# Altium PCB PCB1.PcbDoc
Units mil, origin at the board's own origin, x right, y up, seen from the top; angles counter-clockwise.
Board outline 3937.01 x 3937.01 mil, 2 copper layers (Top Layer, Bottom Layer); 42 components, 28 nets, 160 pads, 4 vias.
Unrouted connection lines stored in the file: 40.
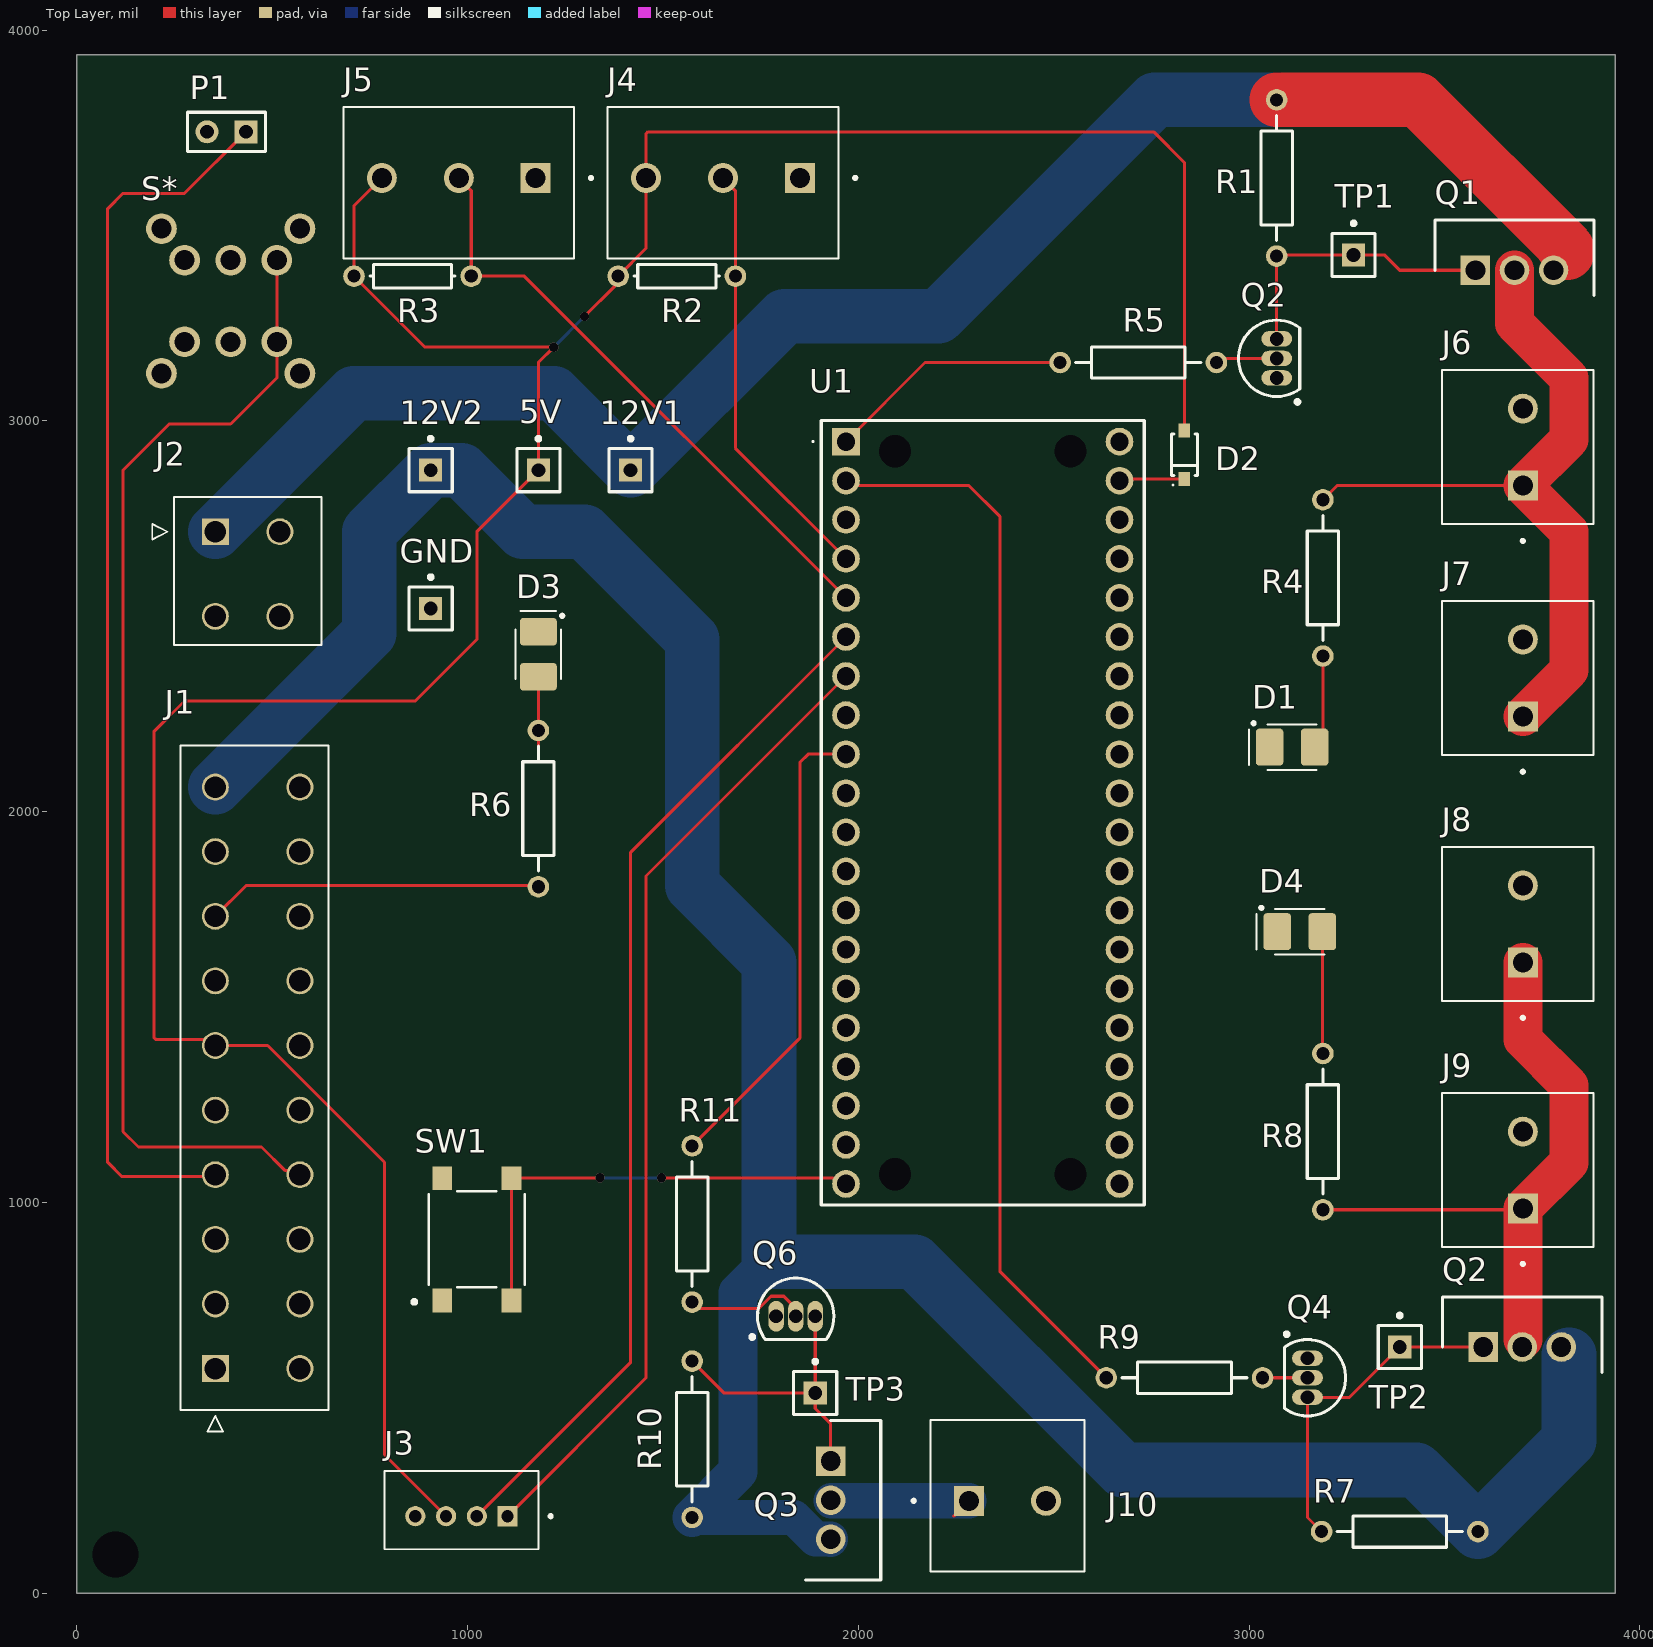
[diagram p0: Top Layer view]
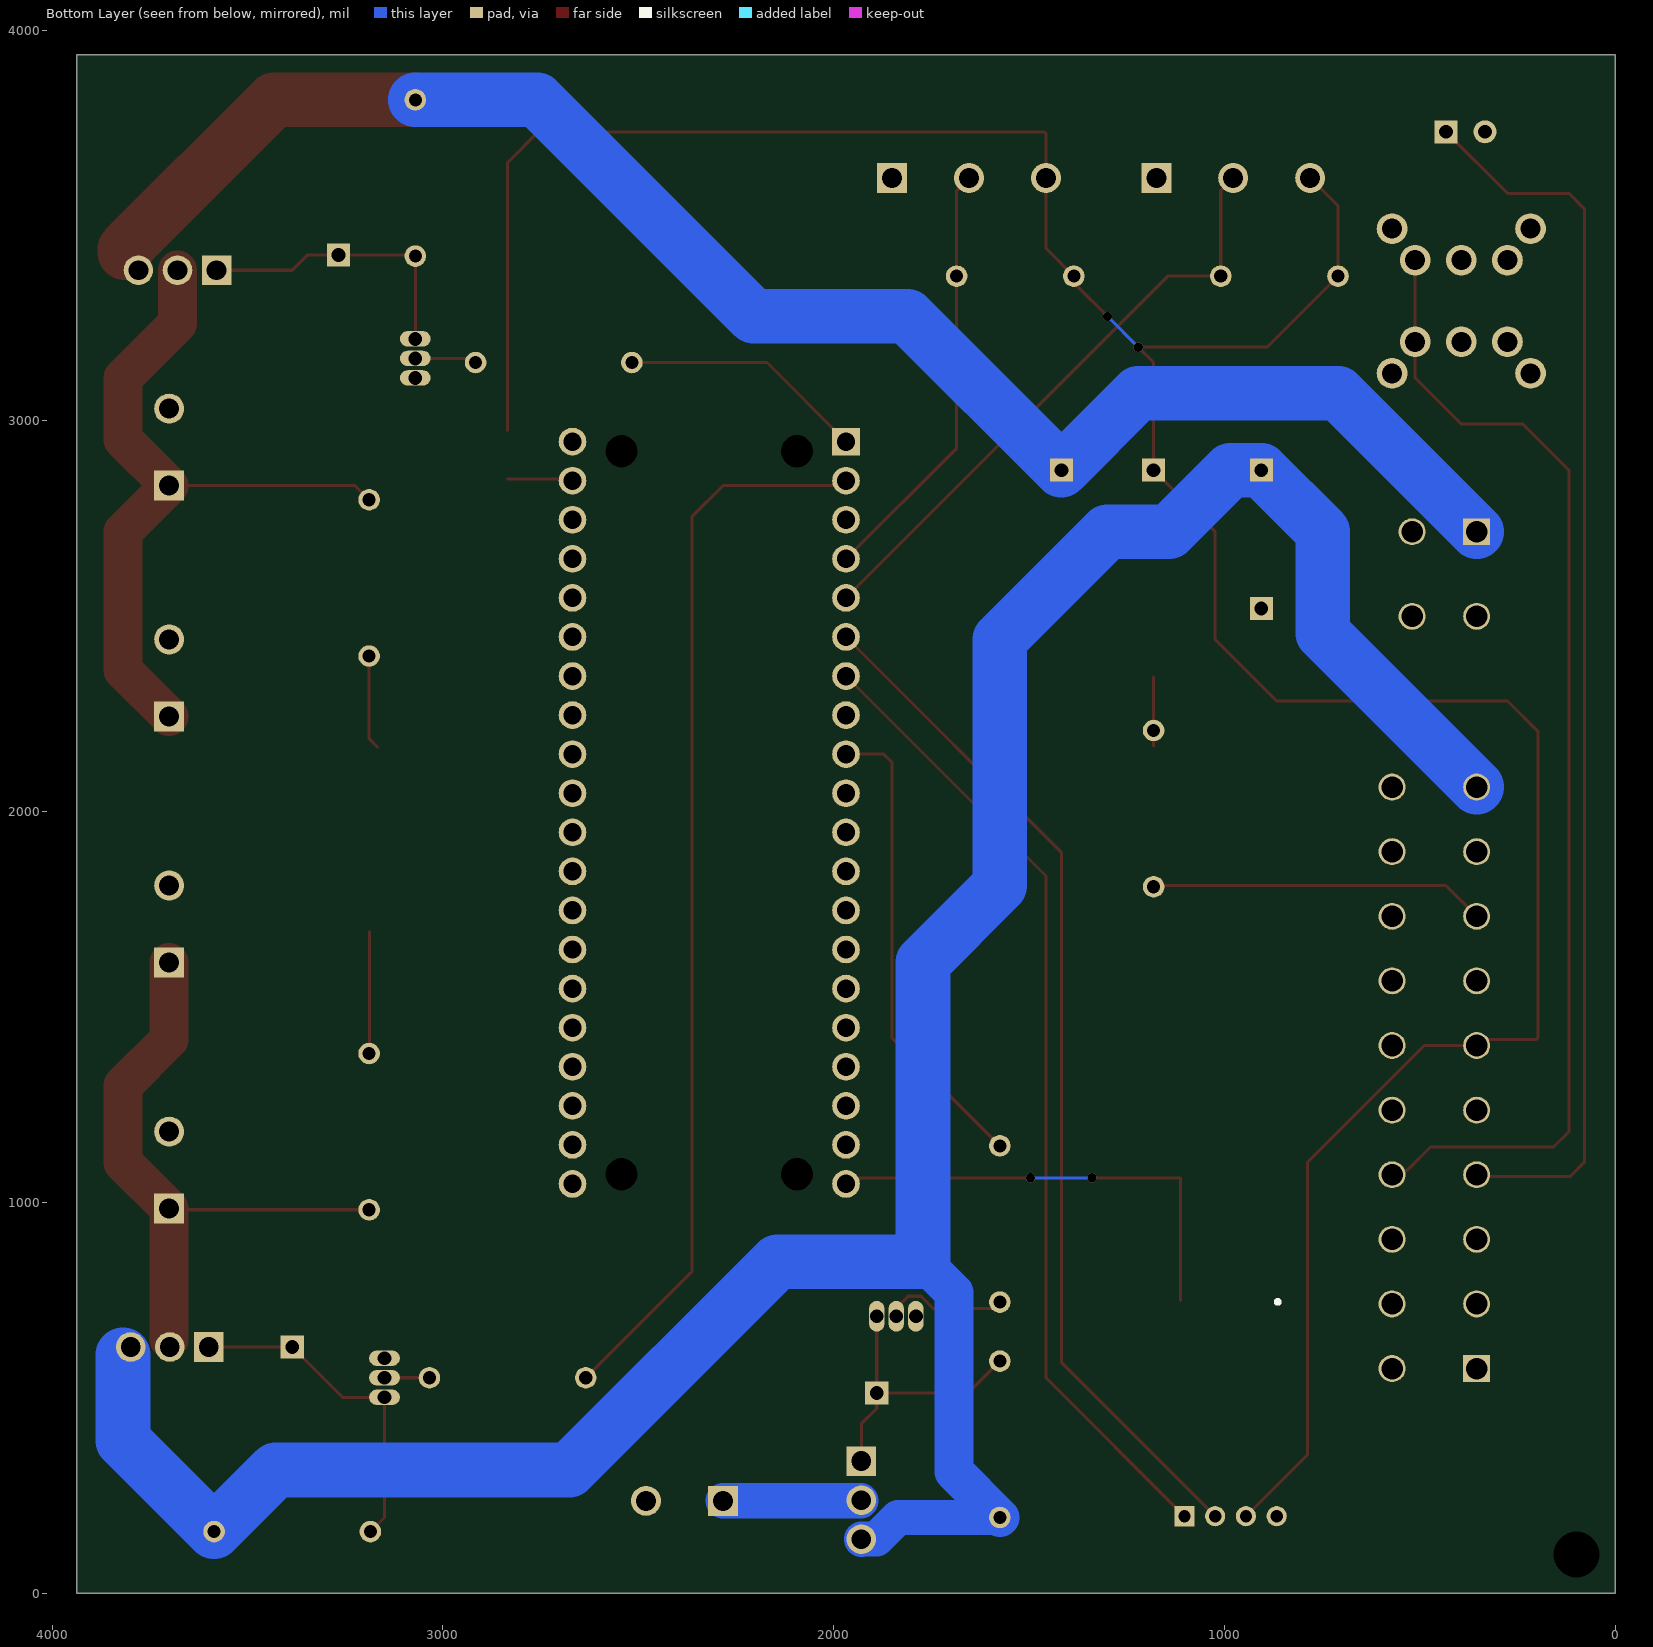
[diagram p1: Bottom Layer view, seen from below]

## Layer stack, top to bottom
Top Solder: solder mask 0.4, Solder Resist, Dk 3.5
Top Layer: signal copper 1.4
Dielectric 1: dielectric 12.6, FR-4, Dk 4.8
Bottom Layer: signal copper 1.4
Bottom Solder: solder mask 0.4, Solder Resist, Dk 3.5

## Board outline
0,0 3937.01,0 3937.01,3937.01 0,3937.01

## Design rules (kind name [scope] priority, off if disabled: settings)
BoardOutlineClearance [All] p1: gap=19.68 ignorepadtopadclearanceinfootprint=FALSE
Clearance Clearance_Text [isText vs inPoly] p1: gap=0.04 ignorepadtopadclearanceinfootprint=FALSE
Clearance Clearance_Polygon [inPoly] p2: gap=19.68 ignorepadtopadclearanceinfootprint=FALSE
Clearance Clearance_All [All] p3: gap=7.87 ignorepadtopadclearanceinfootprint=FALSE
ComponentClearance [All] p1: gap=0 collisioncheckmode=3 verticalgap=0 showdistances=FALSE
Height [All] p1: minheight=0 maxheight=3937.01 prefheight=500
HoleSize [All] p1: absolutevalues=TRUE maxlimit=196.85 minlimit=11.81 maxpercent=80.000 minpercent=20.000
HoleToHoleClearance [All] p1: gap=9.84 allowstackedmicrovias=TRUE
MinimumSolderMaskSliver [All] p1: minsoldermaskwidth=4.33
PlaneClearance [All] p1: clearance=19.68
PlaneConnect [All] p1: planeconnectstyle=Relief reliefexpansion=19.68 reliefentries=4 reliefconductorwidth=9.84 reliefairgap=9.84
PolygonConnect PolygonConnect_Via [isVia] p1: connectstyle=Direct reliefconductorwidth=10 reliefentries=4 polygonreliefangle="90 Angle" airgapwidth=10
PolygonConnect [All] p2: connectstyle=Relief reliefconductorwidth=19.68 reliefentries=4 polygonreliefangle="90 Angle" airgapwidth=9.84
RoutingCorners [All] p1: cornerstyle=45-Degree minsetback=98.43 maxsetback=98.43
RoutingVias [All] p1: holewidth=11.81 width=23.62 viastyle="Through Hole" minholewidth=11.81 minwidth=23.62 maxholewidth=11.81 maxwidth=23.62
SilkToSilkClearance [All] p1: silktosilkclearance=4.33
SilkToSolderMaskClearance [IsPad] p1: minsilkscreentomaskgap=4.33 clearancetoexposedcopper=TRUE
SolderMaskExpansion [All] p1: expansion=4
Width [All] p1: maxlimit=1000 minlimit=7.87 preferedwidth=7.87
20 further rules are at their usual default settings.

## Components (designator, comment, footprint, x,y, rotation, side; value= is the part's Value field where it differs from the comment)
5V "Socket" PIN1 1181.1,2874.02 r0 top
12V1 "Socket" PIN1 1417.32,2874.02 r0 top
12V2 "Socket" PIN1 905.51,2874.02 r0 top
D1 "LED Green" 1411_LED 3110.24,2165.35 r0 top
D2 "BAT54H,115" SOD-123F 2834.65,2913.39 r90 top
D3 "LED Green" 1411_LED 1181.1,2402.95 r270 top
D4 "LED Green" 1411_LED 3129.92,1692.91 r0 top
GND "Socket" PIN1 905.51,2519.68 r0 top
J1 "39-28-1203" 39-28-1203 354.33,574.8 r90 top
J2 "39-28-1043" 39-28-1043 354.33,2716.54 r0 top
J3 "110990030" SEEED_110990030 984.25,196.85 r180 top
J4 "1715035" PHOENIX_1715035 1948.82,3803.15 r180 top
J5 "1715035" PHOENIX_1715035 1272.65,3803.15 r180 top
J6 "1715022" PHOENIX_1715022 3881.89,2736.22 r90 top
J7 "1715022" PHOENIX_1715022 3881.89,2145.67 r90 top
J8 "1715022" PHOENIX_1715022 3881.89,1515.75 r90 top
J9 "1715022" PHOENIX_1715022 3881.89,885.83 r90 top
J10 "1715022" PHOENIX_1715022 2185.04,55.12 r0 top
P1 "Header 2" HDR1X2 433.07,3740.16 r180 top
Q1 "FQPF47P06" TO254P490X1016X1990-3P 3579.53,3385.83 r0 top
Q2 "FQPF47P06" TO254P490X1016X1990-3P 3599.21,629.92 r0 top
Q2 "2N4401" TO-92A 3070.87,3160.24 r0 top
Q3 "FQPF47P06" TO254P490X1016X1990-3P 1929.13,337.98 r270 top
Q4 "2N4401" TO-92A 3149.61,551.18 r180 top
Q6 "2N4401" TO-92A 1839.76,708.66 r270 top
R1 "Res2" AXIAL-0.4 3070.87,3622.05 r90 top value=100K
R2 "Res1" AXIAL-0.3 1535.43,3370.58 r0 top value=4K7
R3 "Res1" AXIAL-0.3 859.26,3370.58 r0 top value=4K7
R4 "Res2" AXIAL-0.4 3188.98,2598.43 r90 top value=1K
R5 "Res2" AXIAL-0.4 2716.54,3149.61 r180 top value=100K
R6 "Res2" AXIAL-0.4 1181.1,2007.87 r90 top value=220
R7 "Res2" AXIAL-0.4 3385.83,157.48 r0 top value=100K
R8 "Res2" AXIAL-0.4 3188.98,1181.1 r270 top value=1K
R9 "Res2" AXIAL-0.4 2834.65,551.18 r180 top value=100K
R10 "Res2" AXIAL-0.4 1574.8,393.7 r270 top value=100K
R11 "Res2" AXIAL-0.4 1574.8,944.88 r270 top value=100K
S* "OS202013MT5QN1" OS202013MT5QN1 393.7,3307.09 r0 top
SW1 "PTS645SM43SMTR92LFS" SWITCH_43SMTR92LFS 1023.62,905.51 r90 top
TP1 "Socket" PIN1 3267.72,3425.2 r0 top
TP2 "Socket" PIN1 3385.83,629.92 r0 top
TP3 "Socket" PIN1 1889.76,511.81 r0 top
U1 "RASPBERRY_PI_PICO_WH" RASPBERRYPIPICOWH 1968.5,2947.24 r0 top

## Footprints (in the part's own frame and the unit in brackets; to place one, negate y for a bottom-side part, rotate by r counter-clockwise, add the part's x,y. Pads: shape width x height; smd on the part's side, far side on the other; paste and mask are expansions set on the pad)
39-28-1043 [mm]
  rect 1.75x1.75 hole 1.4: 1(0,0)
  round 1.75 hole 1.4: 2(4.2,0) 3(0,-5.5) 4(4.2,-5.5)
  silkscreen extent -4.1,-7.35 6.9,2.25, body extent -3.11,-8.74 7.29,2.26, height 12.76
39-28-1203 [mm]
  rect 1.75x1.75 hole 1.4: 1(0,0)
  round 1.75 hole 1.4: 2(4.2,0) 3(8.4,0) 4(12.6,0) 5(16.8,0) 6(21,0) 7(25.2,0) 8(29.4,0) 9(33.6,0) 10(37.8,0) 11(0,-5.5) 12(4.2,-5.5) 13(8.4,-5.5) 14(12.6,-5.5) 15(16.8,-5.5) 16(21,-5.5) 17(25.2,-5.5) 18(29.4,-5.5) 19(33.6,-5.5) 20(37.8,-5.5)
  silkscreen extent -4.1,-7.35 40.5,2.25, body extent -3.16,-7.72 40.84,3.28, height 12.68
1411_LED [mm] "1411 Footprint for LEDs"
  rrect25% 1.79x2.4 smd: A(1.465,0) C(-1.465,0)
  silkscreen extent -2.8,-1.48 1.6,1.65
AXIAL-0.3 [mm] "Axial Device, Thru-Hole; 2 Leads; 0.3 in Pin Spacing"
  round 1.4 hole 0.85: 1(-3.81,0) 2(3.81,0)
  silkscreen extent -2.77,-0.76 2.77,0.76
AXIAL-0.4 [mm] "Axial Device, Thru-Hole; 2 Leads; 0.4 in Pin Spacing"
  round 1.4 hole 0.85: 1(-5.08,0) 2(5.08,0)
  silkscreen extent -4.06,-1.02 4.06,1.02
HDR1X2 [mm] "Connector; Header; 2 Position"
  rect 1.5x1.5 hole 0.9: 1(0,0)
  round 1.5 hole 0.9: 2(2.54,0)
  silkscreen extent -1.27,-1.27 3.81,1.27
OS202013MT5QN1 [mm] "Toggle Switch"
  round 2 hole 1.3: 1(-3,2.65) 2(0,2.65) 3(3,2.65) 4(-3,-2.65) 5(0,-2.65) 6(3,-2.65) 7(-4.5,-4.7) 7(-4.5,4.7) 7(4.5,-4.7) 7(4.5,4.7)
PHOENIX_1715022 [mm]
  rect 1.95x1.95 / inner round 1.95 / far side rect 1.95x1.95 hole 1.3: 1(2.5,4.6)
  round 1.95 hole 1.3: 2(7.5,4.6)
  silkscreen extent -1.2,0 10,9.85, body extent -0.38,0.03 10.19,9.88, height 13.9
PHOENIX_1715035 [mm]
  rect 1.95x1.95 hole 1.3: 1(2.5,4.6)
  round 1.95 hole 1.3: 2(7.5,4.6) 3(12.5,4.6)
  silkscreen extent -1.2,0 15,9.85
PIN1 [mm] "Connector; Plug"
  rect 1.5x1.5 hole 0.9: 1(0,0)
  silkscreen extent -1.4,-1.4 1.4,2.17
RASPBERRYPIPICOWH [mm]
  rect 1.8x1.8 hole 1.2: 1(0,0)
  round 1.8 hole 1.2: 2(0,-2.54) 3(0,-5.08) 4(0,-7.62) 5(0,-10.16) 6(0,-12.7) 7(0,-15.24) 8(0,-17.78) 9(0,-20.32) 10(0,-22.86) 11(0,-25.4) 12(0,-27.94) 13(0,-30.48) 14(0,-33.02) 15(0,-35.56) 16(0,-38.1) 17(0,-40.64) 18(0,-43.18) 19(0,-45.72) 20(0,-48.26) 21(17.78,-48.26) 22(17.78,-45.72) 23(17.78,-43.18) 24(17.78,-40.64) 25(17.78,-38.1) 26(17.78,-35.56) 27(17.78,-33.02) 28(17.78,-30.48) 29(17.78,-27.94) 30(17.78,-25.4) 31(17.78,-22.86) 32(17.78,-20.32) 33(17.78,-17.78) 34(17.78,-15.24) 35(17.78,-12.7) 36(17.78,-10.16) 37(17.78,-7.62) 38(17.78,-5.08) 39(17.78,-2.54) 40(17.78,0)
  round 1.05 hole 2.1 unplated: MH1(3.19,-0.63) MH2(3.19,-47.63) MH3(14.59,-47.63) MH4(14.59,-0.63)
  silkscreen extent -2.2,-49.63 19.39,1.37, body extent -1.61,-49.63 19.39,1.37, height 4.1
SEEED_110990030 [mm]
  rect 1.308x1.308 hole 0.8: 1(-3,0)
  round 1.308 hole 0.8: 2(-1,0) 3(1,0) 4(3,0)
  silkscreen extent -5.9,-2.95 5,2.15
SOD-123F [mm] "SOD-123F, 2-Leads, Body 1.60x3.50mm, IPC Medium Density"
  rect 0.9x0.75 smd: 1(-1.575,0) 2(1.575,0)
  silkscreen extent -1.95,-0.85 1.35,0.85, body extent -1.75,-0.85 1.75,0.85, height 1.2
SWITCH_43SMTR92LFS [mil]
  rect 61x51 smd: 1(-156.5,88.58) 2(156.5,88.58) 3(-156.5,-88.58) 4(156.5,-88.58)
  silkscreen extent -165,-123 123,165
TO254P490X1016X1990-3P [mm]
  rect 1.92x1.92 hole 1.28: 1(0,0)
  round 1.92 hole 1.28: 2(2.54,0) 3(5.08,0)
  silkscreen extent -2.64,-1.64 7.72,3.26, body extent -2.54,-1.64 7.62,3.26, height 19.9
TO-92A [mm] "TO, Flat Index; 3 In-Line, Axial Leads; Body Dia. 4.5mm; Leads 0.51 x 0.48 mm (max)"
  oval 2x1 hole 0.9: 1(0,-1.27) 2(0,0) 3(0,1.27)
  silkscreen extent -2.48,-2.95 1.5,2.48, body extent -2.48,-2.5 1.5,2.5, height 6.86

## Part data
D1 D3 D4: library part 150141GS73100, "Green 525nm LED Indication - Discrete 3.1V 1411 (3528 Metric)", Mouser Part Number=710-150141GS73100, Datasheet=https://www.mouser.ch/datasheet/2/445/150141GS73100-1715081.pdf
D2: "D SCHOTTKY 30V 200MA", Datasheet=https://www.mouser.ch/datasheet/2/916/BAT54H-1598132.pdf, Mouser Number=771-BAT54H-T/R
J1: "Connector", Manufacturer_Name=Molex, Mouser Part Number=538-39-28-1203, Datasheet Link=https://www.molex.com/pdm_docs/sd/039281023_sd.pdf, Height=12.8mm, Manufacturer_Part_Number=39-28-1203, Mouser Price/Stock=https://www.mouser.co.uk/ProductDetail/Molex/39-28-1203?qs=4XSMV6Twtb2DRME9sVHqvA%3D%3D
J2: "Connector", Manufacturer_Name=Molex, Mouser Part Number=538-39-28-1043, Arrow Part Number=39-28-1043, Arrow Price/Stock=https://www.arrow.com/en/products/39-28-1043/molex?region=nac, Datasheet Link=https://www.molex.com/pdm_docs/sd/039281023_sd.pdf, Height=12.8mm, Manufacturer_Part_Number=39-28-1043, Mouser Price/Stock=https://www.mouser.co.uk/ProductDetail/Molex/39-28-1043?qs=LQQHZ4xw2XCMHoV0KRLGhg%3D%3D
J3: "GROVE 2MM 4PIN VERT CONN 10PCS", Package=None, Arrow_Electronics-Purchase-URL=https://snapeda.com/shop?store=Arrow+Electronics&id=583576, Availability=Good, MF="Seeed Technology", Mouser-Purchase-URL=https://snapeda.com/shop?store=Mouser&id=583576, MP=110990030, Price=None, SnapEDA_Link=https://www.snapeda.com/parts/110990030/Seeed%20Technology%20Co.,%20Ltd/view-part/583576/?ref=snap
J6 J7 J8 J9 J10: "PCB Terminal Screw 5mm 16AWG 400V 17.5A 2 Position COMBICON MKDS Series", Package=None, Check_prices=https://www.snapeda.com/parts/1715022/Phoenix+Contact/view-part/?ref=eda, MF="Phoenix Contact", MP=1715022, SnapEDA_Link=https://www.snapeda.com/parts/1715022/Phoenix+Contact/view-part/?ref=snap
P1: "Header, 2-Pin", LatestRevisionDate=17-Jul-2002, LatestRevisionNote="Re-released for DXP Platform.", Publisher="Altium Limited"
Q1 Q2 Q3: "MOSFET (P-Channel)", Manufacturer_Name=onsemi, Mouser Part Number=512-FQPF47P06, Arrow Part Number=FQPF47P06, Arrow Price/Stock=https://www.arrow.com/en/products/fqpf47p06/on-semiconductor, Datasheet Link=https://www.onsemi.com/pdf/datasheet/fqpf47p06-d.pdf, Height=4.9mm, Manufacturer_Part_Number=FQPF47P06, Mouser Price/Stock=https://www.mouser.co.uk/ProductDetail/ON-Semiconductor-Fairchild/FQPF47P06/?qs=Ra3DxqLXWjfTqaAPd3%2FiZw%3D%3D
Q2 Q4 Q6: library part 2N3904, "NPN General Purpose Amplifier", ComponentLink1Description="Manufacturer Link", ComponentLink1URL=http://www.fairchildsemi.com/, ComponentLink2Description=Datasheet, ComponentLink2URL=http://www.fairchildsemi.com/ds/2N%2F2N3904.pdf, DatasheetVersion=1997, LatestRevisionDate=15-Jan-2003, LatestRevisionNote="PCB Footprint 'BCY-W3/D4.7' replaced", PackageDescription="TO, Flat Index; 3 In-Line, Axial Leads; Body Dia. 4.5mm; Leads 0.51 x 0.48 mm (max)", PackageReference=TO-92A, PackageVersion=Sep-1998, Published=8-Jun-2000, Publisher="Altium Limited"
R1 R2 R3 R4 R5 R6 R7 R8 R9 R10 R11: "Resistor", LatestRevisionDate=17-Jul-2002, LatestRevisionNote="Re-released for DXP Platform.", Published=8-Jun-2000, Publisher="Altium Limited"
  R1 R4 R5 R6 R7 R8 R9 R10 R11: PackageDescription="Axial Device, Thru-Hole; 2 Leads; 0.4 in Pin Spacing", PackageReference=AXIAL-0.4
  R2 R3: PackageDescription="Axial Device, Thru-Hole; 2 Leads; 0.3 in Pin Spacing", PackageReference=AXIAL-0.3
S*: "Slide Switch"
SW1: "Tactile Switch Normally Open", Mouser Part Number=611-PTS645SM43SMTR92, Datasheet=https://www.mouser.ch/datasheet/2/60/pts645-1841767.pdf
U1: "Undefined or Miscellaneous", Manufacturer_Name=RASPBERRY-PI, Manufacturer_Part_Number="RASPBERRY PI PICO WH", Datasheet Link=https://datasheets.raspberrypi.com/picow/pico-w-datasheet.pdf, Height=4mm
5V 12V1 12V2 GND TP1 TP2 TP3: LatestRevisionDate=17-Jul-2002, LatestRevisionNote="Re-released for DXP Platform.", Publisher="Altium Limited"
J4 J5: Check_prices=https://www.snapeda.com/parts/1715035/Phoenix+Contact/view-part/?ref=eda, SnapEDA_Link=https://www.snapeda.com/parts/1715035/Phoenix+Contact/view-part/?ref=snap

## Free pads (board coordinates)
  round 60 hole 118.11: 3(98.43,98.43)

## Via types
v1: diameter 23.62, hole 23.62, Top Layer to Bottom Layer, 4 vias

## Nets (pads, with @x,y where several pads share a name; then routed paths per layer and width w, separated by ;. In a path a pad name is that pad's centre, name@x,y a point inside that pad or via, vN(x,y) a via of type N, cw(c..) or ccw(c..) an arc to the next point about the centre after c; other vN are vias at no path point)
5V_VSYS: 5V.1 D2.2 J1.6 J3.3 J4.3 J5.3 R2.1 R3.1 | length 7841
  Top Layer w7.87: J5.3 709.26,3550.79 R3.1 890.87,3188.98 v1(1220.47,3188.98) 1181.1,3149.61 5V.1 1023.62,2716.54 1023.62,2440.94 866.14,2283.46 275.59,2283.46 196.85,2204.72 196.85,1421.94 201.46,1417.32 322.07,1417.32 337.82,1401.57 J1.6 488.19,1401.57 787.4,1102.36 787.4,354.33 J3.3 ; v1(1299.21,3267.72) 1376.39,3344.9 1376.39,3361.54 R2.1 1456.69,3441.84 J4.3 1456.69,3735.54 1461.31,3740.16 2755.91,3740.16 2834.65,3661.42 D2.2
  Bottom Layer w7.87: v1(1220.47,3188.98) v1(1299.21,3267.72)
7SEG_SCL: J3.1 U1.7 | length 2509.2
  Top Layer w7.87: J3.1 1456.69,551.18 1456.69,1835.43 U1.7
7SEG_SDA: J3.2 U1.6 | length 2641.8
  Top Layer w7.87: J3.2 1417.32,590.55 1417.32,1896.06 U1.6
+12V1: 12V1.1 J2.1 Q1.3 R1.2 | length 4282.8
  Top Layer w140: R1.2 3432.68,3822.05 3814.88,3439.84 3814.88,3431.31 3795.2,3459.53
  Bottom Layer w140: J2.1 708.66,3070.87 1220.47,3070.87 12V1.1 1811.02,3267.72 2204.72,3267.72 2759.06,3822.05 R1.2
+12V2: 12V2.1 J1.10 Q2.3@3799.21,629.92 Q3.3 R7.2 R10.2 | length 7325.3
  Bottom Layer w90: R10.2 1835,193.7 1890.35,138.35 1928.77,138.35 Q3.3
  Bottom Layer w100: R10.2 1692.2,311.1 1692.2,768.76 1771.65,848.21
  Bottom Layer w140: J1.10 748.03,2456.69 748.03,2716.54 12V2.1 984.25,2874.02 1141.73,2716.54 1299.21,2716.54 1574.8,2440.94 1574.8,1811.02 1771.65,1614.17 1771.65,848.21 2143.92,848.21 2677.17,314.96 3428.35,314.96 R7.2 3818.9,390.55 Q2.3@3818.9,610.24
GND: D1.C D3.C D4.C GND.1 J1.3 J1.5 J1.7 J1.13 J1.15 J1.16 J1.17 J2.4 J3.4 J4.1 J5.1 J6.2 J7.2 J8.2 J9.2 J10.2 P1.2 Q2.1@3070.87,3110.24 Q4.1 Q6.1 S*.1 S*.2 S*.4 S*.5 S*.7 SW1.1 SW1.2 U1.3 U1.8 U1.13 U1.18 U1.23 U1.28 U1.33 U1.38
Load_resistor: J1.4 P1.1 | length 3169.3
  Top Layer w7.87: J1.4 349.72,1066.25 114.85,1066.25 78.74,1102.36 78.74,3543.31 118.11,3582.68 275.59,3582.68 P1.1
Luefter: R11.1 U1.9 | length 1222.2
  Top Layer w7.87: R11.1 1850.39,1420.47 1850.39,2125.98 1871.65,2147.24 U1.9
NetD1_A: D1.A R4.1 | length 241.8
  Top Layer w7.87: D1.A 3188.98,2186.42 R4.1
NetD2_1: D2.1 U1.39 | length 167.9
  Top Layer w7.87: U1.39 2672.64,2851.38 D2.1
NetD3_A: D3.A R6.2 | length 176.8
  Top Layer w7.87: 1181.1,2168.5 R6.2 D3.A
NetD4_A: D4.A R8.1 | length 312.4
  Top Layer w7.87: D4.A 3187.6,1382.48 R8.1
NetJ6_1: J6.1 J7.1 Q1.2 R4.2 | length 1873
  Top Layer w7.87: R4.2 3225.2,2834.65 J6.1
  Top Layer w100: Q1.2 3679.53,3249.61 3818.9,3110.24 3818.9,2952.76 J6.1 3818.9,2716.54 3818.9,2362.2 J7.1
NetJ8_1: J8.1 J9.1 Q2.2@3699.21,629.92 R8.2 | length 1571.1
  Top Layer w7.87: R8.2 J9.1@3697.64,981.1
  Top Layer w100: Q2.2@3700.79,649.61 J9.1 3818.9,1102.36 3818.9,1299.21 3700.79,1417.32 J8.1
NetJ10_1: J10.1 Q3.2 | length 410.7
  Top Layer w7.87: 2244.09,196.85 J10.1
  Bottom Layer w7.87: Q3.2 Q3.2@1930.9,236.22
  Bottom Layer w90: Q3.2@1930.9,236.22 J10.1
NetQ1_1: Q1.1 Q2.3@3070.87,3210.24 R1.1 TP1.1 | length 738.1
  Top Layer w7.87: Q2.3@3070.87,3210.24 R1.1 3074.02,3425.2 TP1.1 3346.46,3425.2 3385.83,3385.83 Q1.1
NetQ2_1: Q2.1@3599.21,629.92 Q4.3 R7.1 TP2.1 | length 842
  Top Layer w7.87: R7.1 3149.61,193.7 Q4.3 3257.09,501.18 TP2.1 Q2.1@3579.53,629.92
NetQ2_2: Q2.2@3070.87,3160.24 R5.1 | length 158.7
  Top Layer w7.87: R5.1 2929.32,3149.61 2939.95,3160.24 Q2.2@3070.87,3160.24
NetQ3_1: Q3.1 Q6.3 R10.1 TP3.1 | length 735.9
  Top Layer w7.87: R10.1 1656.69,511.81 TP3.1 ; Q6.3 TP3.1 ; Q3.1 1929.13,433.07 1889.76,472.44 TP3.1
NetQ4_2: Q4.2 R9.1 | length 115
  Top Layer w7.87: R9.1 Q4.2
NetQ6_2: Q6.2 R11.2 | length 318.2
  Top Layer w7.87: R11.2 1591.34,728.35 1745.22,728.35 1776.72,759.84 1809.28,759.84 1839.76,729.36 Q6.2
NetSW1_3: SW1.3 SW1.4 U1.20 | length 1176.2
  Top Layer w7.87: SW1.3 SW1.4 1337.6,1062.01 v1(1338.58,1062.99) ; v1(1496.06,1062.99) 1935.71,1062.99 1951.46,1047.24 U1.20
  Bottom Layer w7.87: v1(1338.58,1062.99) v1(1496.06,1062.99)
"Peltier 1": R5.2 U1.1 | length 631.9
  Top Layer w7.87: U1.1 2170.87,3149.61 R5.2
"Peltier 2": R9.2 U1.2 | length 2749.1
  Top Layer w7.87: U1.2 1980.56,2835.19 2004.07,2835.19 2004.61,2834.65 2283.46,2834.65 2362.2,2755.91 2362.2,823.62 R9.2
Pwr_OK: J1.8 R6.1 | length 859.4
  Top Layer w7.87: J1.8 433.07,1811.02 R6.1@1181.1,1811.02
Pwr_ON: J1.14 S*.3 S*.6 | length 2984.1
  Top Layer w7.87: S*.3 S*.6 511.81,3110.24 393.7,2992.13 236.22,2992.13 118.11,2874.02 118.11,1181.1 157.48,1141.73 472.44,1141.73 532.25,1081.92 559.81,1081.92 J1.14
TEMP_COLD: J4.2 R2.2 U1.4 | length 1105.3
  Top Layer w7.87: J4.2 1653.54,3621.36 1685.43,3589.47 R2.2 1685.43,2930.32 U1.4
TEMP_HOT: J5.2 R3.2 U1.5 | length 1565
  Top Layer w7.87: J5.2 977.37,3621.36 1009.26,3589.47 R3.2 1145.17,3370.58 U1.5
pads on no net: J1.1 J1.2 J1.9 J1.11 J1.12 J1.18 J1.19 J1.20 J2.2 J2.3 U1.10 U1.11 U1.12 U1.14 U1.15 U1.16 U1.17 U1.19 U1.21 U1.22 U1.24 U1.25 U1.26 U1.27 U1.29 U1.30 U1.31 U1.32 U1.34 U1.35 U1.36 U1.37 U1.40 U1.MH1 U1.MH2 U1.MH3 U1.MH4

## Silkscreen, mask and mechanical layers (free items; w line width, h text height)
Mechanical 1:
  the board outline again, w10